# Altium PCB AP2-H.PcbDoc (part 4 of 4)
Units mm, origin at the board's own origin, x right, y up, seen from the top; angles counter-clockwise.
Board outline 380 x 190 mm, 2 copper layers (Top Layer, Bottom Layer); 519 components, 519 nets, 1666 pads, 438 vias.
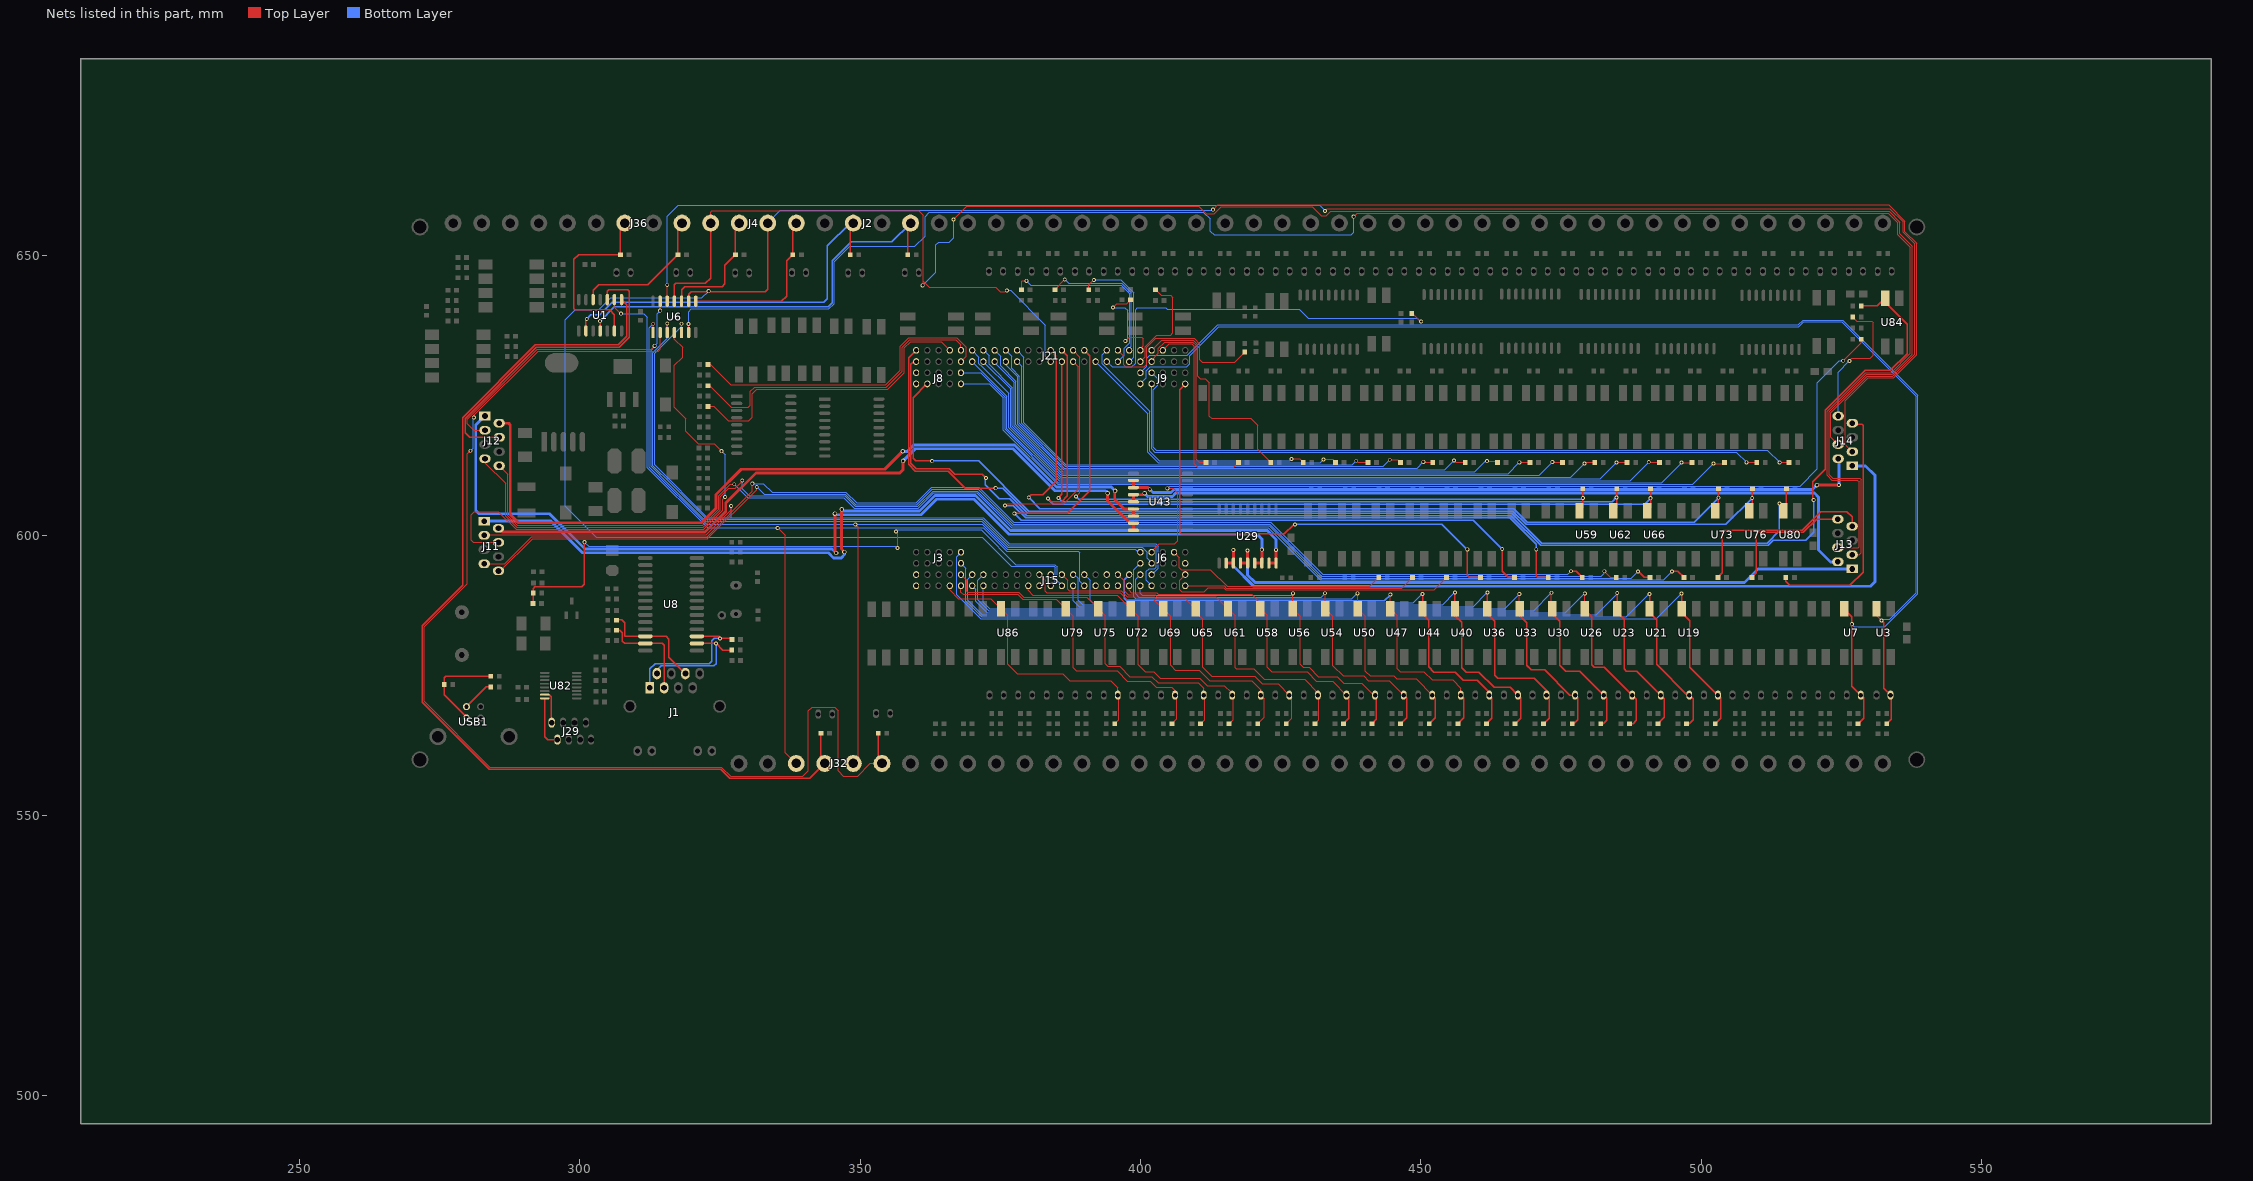
[diagram p4: the nets of this part, all layers, seen from the top]

## Via types
v1: diameter 0.7, hole 0.4, Top Layer to Bottom Layer, 204 vias
v2: diameter 1.2, hole 0.9, Top Layer to Bottom Layer, 160 vias
v3: diameter 1, hole 0.7, Top Layer to Bottom Layer, 38 vias
v4: diameter 0.8, hole 0.5, Top Layer to Bottom Layer, 14 vias
v5: diameter 3.556, hole 3.556, Top Layer to Bottom Layer, 10 vias
v6: diameter 2.3, hole 1.7, Top Layer to Bottom Layer, 8 vias
v7: diameter 1.1, hole 0.8, Top Layer to Bottom Layer, 2 vias
v8: diameter 2.8, hole 2.8, Top Layer to Bottom Layer, 2 vias

## Nets (pads, with @x,y where several pads share a name; then routed paths per layer and width w, separated by ;. In a path a pad name is that pad's centre, name@x,y a point inside that pad or via, vN(x,y) a via of type N, cw(c..) or ccw(c..) an arc to the next point about the centre after c; other vN are vias at no path point) (continued)
PD6: J15.8 LED51.K R225.2 U86.4 | length 49.8
  Top Layer w0.203: J15.8@366,591 366,590.261 367.542,588.719 373.316,588.719 U86.4@375.135,586.9 376.3,585.735 376.3,577 377.994,575.306 386.168,575.306 387.368,574.106 394.687,574.106 395.987,572.806 LED51.K@395.987,571.5 396.135,571.352 396.135,567.111 R225.2@395.424,566.4
PD7: J3.9 LED15.K R53.2 U19.4 | length 167.4
  Top Layer w0.16: U19.4@496.519,586.978 U19.4@496.597,586.9
  Top Layer w0.254: U19.4@496.519,586.978 v1(496.519,589.636) ; U19.4@496.597,586.9 496.597,586.203 498.031,584.769 498.031,576.488 LED15.K@503.019,571.5 503.489,571.03 503.489,567.365 R53.2@502.524,566.4
  Bottom Layer w0.16: J3.9@368,597 367.21,596.21 367.21,589.43 371.551,585.089 491.973,585.089 v1(496.519,589.636)
PD8: J21.19 R97.1 | length 78.3
  Top Layer w0.16: v1(438.506,613.308) 438.814,613 R97.1@440.595,613
  Bottom Layer w0.16: J21.19@378,633 379.21,631.79 379.21,620.102 386.689,612.623 437.82,612.623 v1(438.506,613.308)
PD9: J21.20 R108.1 | length 82.8
  Top Layer w0.16: v1(444.475,613.486) 445.887,613.486 R108.1@446.374,613
  Bottom Layer w0.16: J21.20@378,631 378.841,630.159 378.841,620.018 386.557,612.303 443.291,612.303 v1(444.475,613.486)
PD10: J21.17 R120.1 | length 91.6
  Top Layer w0.16: v1(450.469,613.105) 450.574,613 R120.1@452.153,613
  Bottom Layer w0.16: J21.17@376,633 377.088,631.912 377.088,629.768 378.435,628.421 378.435,619.972 386.424,611.983 449.346,611.983 v1(450.469,613.105)
PD11: J21.18 R64.1 | length 96.1
  Top Layer w0.16: v1(455.93,613.334) 456.264,613 R64.1@457.932,613
  Bottom Layer w0.16: J21.18@376,631 376,630.403 378.115,628.289 378.115,619.84 386.292,611.663 454.259,611.663 v1(455.93,613.334)
PD12: J21.15 R68.1 | length 105.1
  Top Layer w0.16: v1(461.823,613.232) 463.478,613.232 R68.1@463.711,613
  Bottom Layer w0.16: J21.15@374,633 375.056,631.944 375.056,630.25 377.795,627.512 377.795,619.707 386.159,611.343 459.654,611.343 461.543,613.232 v1(461.823,613.232)
PD13: J21.16 R79.1 | length 109.3
  Top Layer w0.16: v1(467.589,613.029) 467.618,613 R79.1@469.489,613
  Bottom Layer w0.16: J21.16@374,631 374,630.824 377.475,627.349 377.475,619.574 386.026,611.023 465.582,611.023 v1(467.589,613.029)
PD14: J21.13 R85.1 | length 118.5
  Top Layer w0.16: v1(473.481,613.08) 473.561,613 R85.1@475.268,613
  Bottom Layer w0.16: J21.13@372,633 372.027,633 372.999,632.028 372.999,630.504 377.155,626.349 377.155,619.442 385.894,610.703 471.104,610.703 v1(473.481,613.08)
PD15: J21.14 R37.1 | length 122.7
  Top Layer w0.16: v1(479.222,612.826) 479.396,613 R37.1@481.047,613
  Bottom Layer w0.16: J21.14@372,631 376.835,626.165 376.835,619.309 385.761,610.383 476.779,610.383 v1(479.222,612.826)
PE0: J15.22 LED44.K R190.2 U72.4 | length 55.8
  Top Layer w0.203: J15.22@380,591 380,590.181 380.84,589.341 395.83,589.341 U72.4@398.271,586.9 399.6,585.571 399.6,576.9 400.868,575.632 402.404,575.632 403.506,574.53 410.62,574.53 411.949,573.2 415,573.2 416.074,572.126 416.374,572.126 LED44.K@416.374,571.5 416.535,571.339 416.535,567.111 R190.2@415.824,566.4
PE1: J15.23 LED43.K R181.2 U69.4 | length 61.1
  Top Layer w0.203: J15.23@382,593 383,592 383,590.062 383.34,589.722 396.443,589.722 397.527,588.638 402.317,588.638 U69.4@404.055,586.9 405.4,585.555 405.4,576.8 406.262,575.938 410.487,575.938 412.362,574.063 419.9,574.063 421.471,572.492 LED43.K@421.471,571.5 422.1,570.871 422.1,567.576 R181.2@420.924,566.4
PE2: J15.27 LED42.K R168.2 U65.4 | length 61.5
  Top Layer w0.203: J15.27@386,593 387,592 387,590.417 387.332,590.086 396.593,590.086 397.66,589.019 402.481,589.019 402.8,588.7 408.039,588.7 U65.4@409.839,586.9 409.839,586.261 411.1,585 411.1,576.475 412.699,574.876 420.386,574.876 421.756,573.506 424.561,573.506 LED42.K@426.568,571.5 427,571.068 427,567.376 R168.2@426.024,566.4
PE3: J15.29 LED30.K R101.2 U40.4 | length 105.2
  Top Layer w0.254: v1(456.108,589.813) 456.11,589.812 U40.4@456.11,586.9 456.11,585.69 457.3,584.5 457.3,576.4 458.087,575.613 460.387,575.613 463.1,572.9 465.942,572.9 LED30.K@467.342,571.5 467.8,571.042 467.8,567.376 R101.2@466.824,566.4
  Bottom Layer w0.16: J15.29@388.241,593 388.884,592.357 388.884,588.447 389.715,587.616 453.911,587.616 v1(456.108,589.813)
  Bottom Layer w0.203: J15.29@388,593 J15.29@388.241,593
PE4: J15.30 LED29.K R94.2 U36.4 | length 110.8
  Top Layer w0.254: U36.4@461.894,586.9 461.894,586.006 463.2,584.7 463.2,575 463.721,574.479 470.221,574.479 472.439,572.261 LED29.K@472.439,571.5 ; U36.4@461.899,586.905 v1(461.899,589.813) ; R94.2@472.309,566.4 R94.2@471.924,566.4 472.9,567.376 472.9,571.039 LED29.K@472.439,571.5 ; LED29.K@472.439,571.734 LED29.K@472.439,571.5
  Bottom Layer w0.16: J15.30@388,591 388,588.351 389.054,587.296 459.382,587.296 v1(461.899,589.813)
PE5: J15.32 J32.1 U1.9 | length 167.9
  Top Layer w0.16: U1.9@306.183,642.045 306.183,640.703 v1(307.34,639.547) ; v1(335.305,601.32) 336.652,599.973 336.652,563.303 336.652,561.264 J32.1@338.607,559.308
  Bottom Layer w0.16: v1(307.34,639.547) 311.44,639.547 312.075,638.912 312.075,612.054 322.809,601.32 371.993,601.32 376.124,597.189 388.941,597.189 389.204,596.925 389.204,591.796 J15.32@390,591
PE6: J15.31 LED32.K R117.2 U44.4 | length 97.4
  Top Layer w0.254: v1@450.326,589.55 U44.4@450.326,586.9 450.326,585.974 451.406,584.894 451.406,576.541 452.334,575.613 456.177,575.613 457.632,574.157 460.088,574.157 462.245,572 462.7,571.045 462.7,567.376 R117.2@461.724,566.4
  Bottom Layer w0.16: J15.31@390,593 391.033,591.967 391.033,588.442 391.538,587.936 448.694,587.936 v1(450.317,589.559)
PE7: J21.42 R186.1 | length 18.9
  Top Layer w0.16: J21.42@400,631 400.853,631.853 400.853,633.644 402.92,635.711 405.384,635.711 405.816,636.143 405.816,642.391 405.409,642.798 403.702,642.798 R186.1@402.7,643.8
PE8: J21.41 R192.1 | length 18.1
  Top Layer w0.203: v1(395.097,640.639) 395.765,641.307 397.526,641.307 R192.1@398.246,642.027 ; v1(397.307,634.67) 397.993,635.356 400.202,635.356 400.535,635.023 400.535,633.83 400,633.295 J21.41@400,633
  Bottom Layer w0.203: v1(395.097,640.639) 397.189,640.639 397.722,640.105 397.722,635.085 v1(397.307,634.67)
PE9: J21.40 R198.1 | length 22.7
  Top Layer w0.16: R198.1@390.8,643.8 390.8,644.673 v1(391.693,645.566)
  Bottom Layer w0.16: v1@391.846,645.592 396.494,645.592 398.79,643.296 398.79,631.79 J21.40@398,631
PE10: J21.39 R210.1 | length 25.8
  Top Layer w0.16: R210.1@384.775,643.8 384.775,643.906 v1(386.512,645.643)
  Bottom Layer w0.16: v1(386.512,645.643) 387.198,644.957 396.672,644.957 396.674,644.959 398.384,643.249 398.384,633.706 398,633.323 J21.39@398,633
PE11: J21.38 R222.1 | length 34.7
  Top Layer w0.16: R222.1@378.8,643.8 378.8,645.297 378.943,645.439 v1@379.628,645.439
  Bottom Layer w0.16: v1(379.668,645.4) 380.449,644.619 396.562,644.619 398.064,643.117 398.064,634.335 397.104,633.374 397.104,632.104 J21.38@396,631
PE12: J21.37 R171.1 | length 32.7
  Top Layer w0.16: J21.37@396,633 397.027,631.973 397.027,630.428 397.383,630.072 400.71,630.072 401.173,630.535 401.173,633.511 402.782,635.12 409.589,635.12 410.616,634.092 410.616,631.276 410.994,630.899 416.799,630.899 R171.1@418.6,632.7
PE13: J21.36 R157.1 | length 69.7
  Top Layer w0.16: R157.1@448.4,639.6 448.485,639.6 v1@450.024,638.061
  Bottom Layer w0.16: J21.36@394,631 394.953,630.047 398.475,630.047 399.136,630.707 399.136,640.258 399.472,640.594 404.536,640.594 404.806,640.324 428.351,640.324 429.967,638.708 449.377,638.708 v1@450.024,638.061
  other v1: 450.088,638.124
PE14: J21.35 R145.1 | length 50.7
  Top Layer w0.16: v1(426.949,613.639) 428.398,613.639 R145.1@429.037,613
  Bottom Layer w0.16: J21.35@394,633 393.21,632.21 393.21,630.623 401.68,622.153 401.68,614.955 403.327,613.308 403.708,613.308 ; 403.352,613.308 403.708,613.308 ; v1(426.949,613.639) 426.618,613.308 403.708,613.308
PE15: J21.34 R91.1 | length 54.8
  Top Layer w0.203: v1(432.664,613.537) 434.279,613.537 R91.1@434.816,613
  Bottom Layer w0.203: J21.34@392,631 401.338,621.662 401.338,614.814 403.186,612.967 432.093,612.967 v1(432.664,613.537)
PF0: J15.37 LED41.K R161.2 U61.4 | length 56.7
  Top Layer w0.203: J15.37@396,593 397.1,591.9 397.1,590.143 397.843,589.4 402.639,589.4 402.958,589.081 413.442,589.081 U61.4@415.623,586.9 416.9,585.623 416.9,576.4 417.111,576.189 420.223,576.189 422.092,574.319 429.274,574.319 LED41.K@431.665,571.929 ; R161.2@431.124,566.4 431.835,567.111 431.835,571.329 LED41.K@431.665,571.5
  Top Layer w0.254: LED41.K@431.665,571.5 LED41.K@431.665,571.929
PF1: J15.40 LED40.K R149.2 U58.4 | length 59
  Top Layer w0.203: J15.40@398,591 398,590.181 398.4,589.781 402.881,589.781 403.2,589.462 419.838,589.462 421.406,587.894 U58.4@421.406,586.9 422.6,585.706 422.6,576.5 423.468,575.632 429.768,575.632 431.405,573.995 434.23,573.995 434.232,573.994 434.268,573.994 LED40.K@436.761,571.5
  Top Layer w0.254: R149.2@436.224,566.4 437.2,567.376 437.2,571.061 LED40.K@436.761,571.5
PF2: J15.39 LED31.K R123.2 U47.4 | length 86.3
  Top Layer w0.203: v1(444.576,589.432) 444.542,589.398 U47.4@444.542,586.9 445.8,585.642 445.8,576.2 446.311,575.689 450.536,575.689 452.027,574.198 455.702,574.198 457.148,572.752 LED31.K@457.148,571.5
  Top Layer w0.254: R123.2@456.624,566.4 457.7,567.476 457.7,570.948 LED31.K@457.148,571.5
  Bottom Layer w0.254: J15.39@398,593 397.1,592.1 397.1,588.801 397.598,588.303 443.523,588.303 v1@444.614,589.394
PF3: J15.42 LED39.K R143.2 U56.4 | length 63.2
  Top Layer w0.203: v1(427.228,589.661) 427.19,589.623 U56.4@427.19,586.9 428.5,585.59 428.5,576.985 429.04,576.445 430.105,576.445 431.742,574.808 435.103,574.808 436.311,573.6 439.501,573.6 441.601,571.5 LED39.K@441.858,571.5
  Top Layer w0.254: R143.2@441.324,566.4 442.086,567.162 442.086,571.272 LED39.K@441.858,571.5
  Bottom Layer w0.203: J15.42@400,591 400,589.643 400.311,589.332 426.899,589.332 v1(427.228,589.661)
PF4: J15.41 LED34.K R135.2 U54.4 | length 72.2
  Top Layer w0.203: v1(432.93,589.674) 432.974,589.63 U54.4@432.974,586.9 434.3,585.574 434.3,576.76 436.147,574.913 439.838,574.913 440.651,574.1 444.355,574.1 LED34.K@446.955,571.5
  Top Layer w0.254: R135.2@446.424,566.4 447.5,567.476 447.5,570.955 LED34.K@446.955,571.5
  Bottom Layer w0.16: J15.41@400,593 399.151,592.151 399.151,589.569 399.73,588.99 432.247,588.99 v1(432.93,589.674)
PF5: J6.2 LED33.K R129.2 U50.4 | length 80.9
  Top Layer w0.203: v1(438.734,589.661) 438.758,589.637 U50.4@438.758,586.9 440.1,585.558 440.1,575.8 440.987,574.913 445.192,574.913 445.728,574.376 449.176,574.376 LED33.K@452.052,571.5
  Top Layer w0.254: R129.2@451.524,566.4 452.6,567.476 452.6,570.952 LED33.K@452.052,571.5
  Bottom Layer w0.16: J6.2@400,595 398.831,593.831 398.831,589.047 399.207,588.67 437.693,588.67 438.506,589.483 438.734,589.483 v1(438.734,589.661)
PF6: J6.1 J32.3 U6.1 | length 165.2
  Top Layer w0.16: U6.1@313.067,636.177 v1@313.067,637.743 ; J32.3@349.098,559.598 349.656,559.039 349.656,601.421 v1(349.148,601.929)
  Bottom Layer w0.16: v1@313.086,637.763 312.395,637.071 312.395,612.186 322.626,601.955 371.811,601.955 376.257,597.509 399.111,597.509 399.62,597 J6.1@400,597
  other v1: 313.106,637.743
PF7: J15.44 U6.3 | length 133.7
  Top Layer w0.16: U6.3@315.607,636.177 v1(315.607,637.794)
  Bottom Layer w0.16: 315.607,609.879 316.212,609.274 ; v1(315.607,637.794) 315.607,635.185 313.035,632.612 313.035,612.451 316.212,609.274 ; J15.44@402.227,591 J15.44@402,591 401.041,591.959 401.041,593.573 401.549,594.081 402.6,594.081 402.854,594.335 402.854,597.955 402.649,598.16 376.51,598.16 371.811,602.859 327.137,602.859 327.132,602.854 322.632,602.854 316.212,609.274
PF8: J11.3 J15.43 U6.5 | length 178.8
  Top Layer w0.16: J11.3@282.956,599.999 283.047,600.09 322.548,600.09 327,604.542 v1(327,605.231) ; U6.5@318.147,636.177 v1@318.147,637.743
  Bottom Layer w0.16: v1(318.16,637.743) 318.16,637.286 313.355,632.48 313.355,612.584 322.759,603.179 327,603.179 ; v1(327,605.231) 327,603.179 ; J15.43@402,593 403.174,594.174 403.174,598.087 402.781,598.48 376.643,598.48 371.944,603.179 327,603.179
PF9: J6.4 J12.3 U6.13 | length 171.3
  Top Layer w0.16: J12.3@283.083,618.744 281.07,618.744 279.908,619.906 279.908,620.679 292.426,633.197 312.75,633.197 v1(313.36,633.806) ; v1(314.337,640.08) U6.13@314.337,641.765
  Bottom Layer w0.16: v1(314.337,640.08) 313.817,639.56 313.817,634.263 v1(313.36,633.806) 313.36,633.689 312.715,633.044 312.715,612.319 315.817,609.217 ; 315.287,609.746 315.817,609.217 ; J6.4@402,595 402,595.077 401.193,595.884 401.193,596.974 400.327,597.84 376.378,597.84 371.679,602.539 327.27,602.539 327.265,602.534 322.499,602.534 315.817,609.217
PF10: J6.3 R31.1 | length 160.3
  Top Layer w0.16: J6.3@402,597 402,597.148 403.357,598.505 406.126,598.505 406.654,599.034 406.654,607.543 405.816,608.38 405.155,608.38 ; v1(404.8,608.38) v1@404.978,608.203 ; v1(525.348,631.139) 528.574,634.365 R31.1@528.574,634.975
  Bottom Layer w0.16: v1(404.8,608.38) 405.203,608.783 517.657,608.783 520.751,611.877 520.751,627.228 524.662,631.139 v1(525.348,631.139)
PF11: J21.45 R132.1 | length 35.7
  Top Layer w0.16: J21.45@404,633 405.16,634.16 409.191,634.16 409.616,633.736 409.616,612.734 410.21,612.14 411.326,612.14
  Top Layer w0.203: 411.326,612.14 416.619,612.14 R132.1@417.479,613
PF12: J9.4 R11.1 | length 120.5
  Top Layer w0.16: v1(508.127,613.029) 509.913,613.029 R11.1@509.942,613
  Bottom Layer w0.16: J9.4@402,627 402,615.422 402.565,614.858 506.298,614.858 v1(508.127,613.029)
PF13: J9.3 R23.1 | length 128.6
  Top Layer w0.16: v1(514.023,613) R23.1@515.721,613
  Bottom Layer w0.16: J9.3@402,629 403.073,627.927 403.073,626.745 402.32,625.992 402.32,615.696 402.838,615.178 511.846,615.178 v1(514.023,613)
PF14: J21.44 R126.1 | length 32.6
  Top Layer w0.16: J21.44@402,631 402,631.251 403.21,632.461 403.21,633.377 404.313,634.48 409.324,634.48 409.936,633.868 409.936,613.588 410.523,613 R126.1@411.7,613
PF15: J21.43 R140.1 | length 40.4
  Top Layer w0.16: J21.43@402,633 403.8,634.8 409.456,634.8 410.256,634.001 410.256,628.35 410.667,627.939 411.607,627.939 412.318,627.228 412.318,621.233 412.699,620.852 419.684,620.852 420.929,619.608 420.929,615.329 R140.1@423.258,613
PG0: J9.2 LED1.K R10.2 U3.4 | length 215.2
  Top Layer w0.16: U3.4@531.3,586.9 531.3,585.716 v1(532.206,584.81)
  Top Layer w0.254: v1(532.206,584.81) 532.6,584.416 532.6,572.7 LED1.K@533.8,571.5 533.911,571.389 533.911,567.187 R10.2@533.124,566.4
  Bottom Layer w0.16: J9.2@400,627 401.066,628.066 401.066,629.371 401.792,630.098 408.265,630.098 408.79,630.623 408.79,632.056 413.948,637.214 517.465,637.214 518.334,638.084 525.114,638.084 525.693,637.504 ; 525.505,637.692 525.693,637.504 ; v1@532.441,585.024 533.67,585.024 538.363,589.717 538.363,624.834 525.693,637.504
PG1: J9.1 LED2.K R14.2 U7.4 | length 221.1
  Top Layer w0.254: U7.4@525.516,586.9 526.9,585.516 v1(526.9,584.149) 526.9,573.1 LED2.K@528.5,571.5 529,571 529,567.376 R14.2@528.024,566.4
  Bottom Layer w0.16: J9.1@400,629 401.149,630.149 401.149,631.577 401.676,632.104 408.386,632.104 413.816,637.534 517.332,637.534 518.202,638.404 525.247,638.404 538.683,624.967 538.683,589.585 532.79,583.692 527.357,583.692 v1(526.9,584.149)
PG2: J21.11 R42.1 | length 131.8
  Top Layer w0.16: v1(484.933,613) R42.1@486.826,613
  Bottom Layer w0.16: J21.11@370,633 371.21,631.79 371.21,630.623 371.673,630.16 371.692,630.16 376.515,625.338 376.515,619.177 385.629,610.063 481.996,610.063 v1(484.933,613)
PG3: J21.12 R50.1 | length 136.2
  Top Layer w0.16: v1(490.677,613.054) 492.551,613.054 R50.1@492.605,613
  Bottom Layer w0.16: J21.12@370,631 376.195,624.805 376.195,619.044 385.496,609.743 487.365,609.743 v1(490.677,613.054)
PG4: J21.9 R230.1 | length 57
  Top Layer w0.203: R230.1@322.859,626.694 323.215,626.694 327.05,622.859 330.04,622.859 330.421,623.24 330.421,625.663 331.173,626.415 354.691,626.415 357.533,629.257 357.533,633.575 358.875,634.916 367.057,634.916 368,633.974 J21.9@368,633
PG5: J21.10 R226.1 | length 57.3
  Top Layer w0.203: R226.1@322.885,630.479 323.266,630.479 326.923,626.821 354.584,626.821 357.17,629.407 357.17,633.725 358.724,635.279 367.208,635.279 368.935,633.552 368.935,631.935 J21.10@368,631
PG6: J8.9 R54.1 | length 143.3
  Top Layer w0.16: v1(496.519,612.978) 498.362,612.978 R54.1@498.384,613
  Bottom Layer w0.16: J8.9@368,629 371.531,629 375.875,624.657 375.875,618.912 385.364,609.423 492.964,609.423 v1(496.519,612.978)
PG7: J8.10 R7.1 | length 148.6
  Top Layer w0.16: v1(502.209,612.8) 503.964,612.8 R7.1@504.163,613
  Bottom Layer w0.16: J8.10@368,627 373.079,627 375.555,624.524 375.555,618.779 385.231,609.103 498.511,609.103 v1(502.209,612.8)
PG8: J21.7 R238.1 | length 55.8
  Top Layer w0.203: R238.1@322.859,622.996 323.941,622.996 326.517,620.42 330.175,620.42 330.784,621.03 330.784,625.264 331.572,626.052 354.926,626.052 357.896,629.021 357.896,633.424 359.025,634.553 364.447,634.553 J21.7@366,633
PG9: J3.10 LED16.K R57.2 U21.4 | length 159.2
  Top Layer w0.254: v1(490.804,589.559) 490.813,589.551 U21.4@490.813,586.9 490.813,586.187 492.1,584.9 492.1,576.972 497.572,571.5 LED16.K@497.923,571.5 498.579,570.843 498.579,567.1 497.879,566.4 R57.2@497.424,566.4
  Bottom Layer w0.16: J3.10@368,595 368.884,594.116 368.884,590.147 368.868,590.131 368.868,588.285 368.884,588.27 368.884,588.239 369.799,587.325
  Bottom Layer w0.203: 369.799,587.325 371.668,585.455 486.7,585.455 v1(490.804,589.559)
PG10: J15.9 LED49.K R196.2 U75.4 | length 64.5
  Top Layer w0.203: J15.9@368,593 369,592 369,590.062 369.2,589.862 378.286,589.862 379.187,588.96 390.427,588.96 U75.4@392.487,586.9 393.7,585.687 393.7,577.082 394.161,576.621 396.295,576.621 398.096,574.819 402.068,574.819 403.17,573.717 410.283,573.717 411.277,572.723 LED49.K@411.277,571.5 411.435,571.342 411.435,567.111 R196.2@410.724,566.4
PG11: J15.10 LED50.K R202.2 U79.4 | length 58.4
  Top Layer w0.203: J15.10@368,591 368,589.859 368.378,589.481 378.153,589.481 379.055,588.579 385.024,588.579 U79.4@386.703,586.9 388,585.603 388,576.4 388.592,575.808 395.867,575.808 397.668,574.006 401.731,574.006 402.833,572.904 405.596,572.904 406.181,572.319 LED50.K@406.181,571.5 406.5,571.181 406.5,567.276 R202.2@405.624,566.4
PG12: J15.11 LED17.K R67.2 U23.4 | length 151
  Top Layer w0.16: U23.4@485.029,586.9 U23.4@485.064,586.935
  Top Layer w0.254: U23.4@485.029,586.3 486.3,585.029 486.3,576.2 486.7,575.8 488.526,575.8 LED17.K@492.826,571.5 493.479,570.847 493.479,567.555 R67.2@492.324,566.4 ; U23.4@485.064,586.935 v1(485.064,589.712)
  Bottom Layer w0.16: 369.21,589.99 369.21,592.21 J15.11@370,593
  Bottom Layer w0.203: 369.21,589.99 369.21,588.427 371.819,585.818 481.272,585.818 v1@484.962,589.509
PG13: J15.12 LED18.K R72.2 U26.4 | length 142.8
  Top Layer w0.16: U26.4@479.245,586.9 479.273,586.927 v1(479.273,589.636)
  Top Layer w0.254: U26.4@479.247,586.74 480.5,585.487 480.5,576.9 480.954,576.446 482.783,576.446 LED18.K@487.729,571.5 488.479,570.75 488.479,567 487.879,566.4 R72.2@487.224,566.4
  Bottom Layer w0.203: J15.12@370,591 370.611,590.389 370.611,588.239 372.669,586.181 475.818,586.181 v1(479.273,589.636)
PG14: J15.13 LED19.K R82.2 U30.4 | length 138.5
  Top Layer w0.16: U30.4@473.329,587.032 v1(473.329,589.763)
  Top Layer w0.254: U30.4@473.461,586.054 474.8,584.715 474.8,576.846 ; 475.2,576.446 474.8,576.846 ; R82.2@482.124,566.4 482.579,566.4 483.2,567.021 483.2,570.932 LED19.K@482.632,571.5 478.332,575.8 475.846,575.8 474.8,576.846
  Bottom Layer w0.203: J15.13@372,593 371,592 371,588.509 372.955,586.555 470.121,586.555 v1(473.329,589.763)
PG15: J15.14 LED20.K R88.2 U33.4 | length 130.3
  Top Layer w0.16: U33.4@467.589,586.989 v1(467.589,589.534)
  Top Layer w0.254: U33.4@467.677,586.9 467.677,585.623 468.9,584.4 468.9,576.8 ; 469.13,576.57 468.9,576.8 ; R88.2@477.024,566.4 477.305,566.4 478.005,567.1 478.005,571.03 LED20.K@477.535,571.5 476.6,571.5 472.1,576 469.7,576 468.9,576.8
  Bottom Layer w0.203: J15.14@372,591 372,588.023 373.105,586.918 464.972,586.918 v1(467.589,589.534)
PH2: J6.7 R89.1 | length 40.7
  Top Layer w0.16: J6.7@406,597 406.959,596.041 406.959,594.208 407.264,593.903 412.496,593.903 415.473,590.926 440.929,590.926 R89.1@442.503,592.5
PH3: J15.50 R95.1 | length 41.5
  Top Layer w0.16: J15.50@408,591 408.008,590.992 414.954,590.992 415.34,590.606 446.661,590.606 R95.1@448.555,592.5
PH4: J15.49 R102.1 | length 52.2
  Top Layer w0.16: J15.49@408,593 407.01,592.01 407.01,590.321 407.391,589.94 411.383,589.94 412.095,590.652 414.842,590.652 415.208,590.286 452.393,590.286 R102.1@454.607,592.5
PH5: J9.10 R118.1 | length 87.9
  Top Layer w0.254: J9.10@408,627 406.984,625.984 406.984,607.731 407.021,607.695 407.021,600.572 407.314,600.278 425.679,600.278 427.33,601.929 v1(427.584,601.929) ; v1(458.318,597.51) 458.318,592.861 458.679,592.5 R118.1@460.659,592.5
  Bottom Layer w0.254: v1@427.622,601.967 427.634,601.98 453.746,601.98 v1@458.267,597.459
PH6: J21.31 R124.1 | length 136.9
  Top Layer w0.254: v1(377.52,603.91) 386.929,603.91 391.008,607.989 391.008,631.992 J21.31@390,633 ; v1(464.538,597.555) 464.538,593.594 465.633,592.5 R124.1@466.71,592.5
  Bottom Layer w0.254: v1@377.52,603.936 378.775,602.681 459.412,602.681 v1(464.538,597.555)
PH7: J21.30 R130.1 | length 142.6
  Top Layer w0.16: v1@376.072,605.409 376.276,605.612 386.319,605.612 388.884,608.178 388.884,630.116 J21.30@388,631
  Top Layer w0.254: v1(470.611,597.51) 470.611,592.799 470.91,592.5 R130.1@472.762,592.5
  Bottom Layer w0.254: v1(375.869,605.307) 377.36,605.307 379.572,603.095 465.915,603.095 470.611,598.399 v1(470.611,597.51)
PH8: J21.29 R150.2 U59.4 | length 121.7
  Top Layer w0.16: J21.29@388,633 389.204,631.796 389.204,607.593 v1(388.532,606.921)
  Top Layer w0.254: U59.4@478.327,604.4 478.903,604.976 R150.2@478.903,608.3
  Bottom Layer w0.254: v1(388.532,606.921) 389.046,606.407 478.645,606.407 v1(478.917,606.679)
PH9: J21.28 R162.2 U62.4 | length 128.8
  Top Layer w0.254: v1(385.394,606.679) 386,607.285 J21.28@386,631 ; U62.4@484.38,604.4 484.956,604.976 R162.2@484.956,608.3
  Bottom Layer w0.254: v1(385.394,606.679) 386.08,605.993 484.149,605.993 v1(484.911,606.755)
PH10: J21.27 R169.2 U66.4 | length 142.7
  Top Layer w0.254: v1(383.54,606.577) 384.099,606.019 385.978,606.019 386.994,607.035 386.994,632.006 J21.27@386,633 ; U66.4@490.433,604.4 491.009,604.976 R169.2@491.009,608.3
  Bottom Layer w0.254: v1@383.692,606.349 384.462,605.579 489.958,605.579 v1(491.007,606.628)
PH11: J4.1 J13.3 J21.26 U6.11 | length 367.7
  Top Layer w0.16: J4.1@323.342,655.93 323.342,657.657 323.571,657.885 360.477,657.885 361.236,657.127 361.236,645.366 ; v1(361.163,644.601) 361.236,644.674 361.236,645.366 ; v1@366.801,656.463 369.023,658.684 410.453,658.684 411.734,657.403 413.177,657.403 414.407,658.632 430.621,658.632 432.257,656.996 433.146,656.996 433.923,657.774 533.533,657.774 535.422,655.884 535.422,653.776 537.667,651.531 537.667,632.324 534.069,628.725 529.544,628.725 522.835,622.015 522.835,610.813 523.474,610.174 528.356,610.174 528.537,609.992 528.537,596.863 528.218,596.544 J13.3@526.948,596.544 ; v1@376.174,643.712 375.92,643.458 375.036,643.458 374.227,644.267 362.335,644.267 361.236,645.366
  Top Layer w0.254: U6.11@316.877,641.765 316.877,644.715 317.094,644.931 322.402,644.931 323.342,645.871 J4.1@323.342,655.701
  Bottom Layer w0.16: v1(361.163,644.601) 363.499,646.938 363.499,651.789 364.033,652.323 365.938,652.323 366.674,653.059 v1(366.674,656.336) ; v1(376.174,643.687) 376.861,643.687 383.032,637.515 383.032,631.968 J21.26@384,631
PH12: J21.25 R191.2 U73.4 | length 160.7
  Top Layer w0.254: v1(380.086,606.755) 380.568,607.238 382.575,607.238 385.013,609.676 385.013,631.987 J21.25@384,633 ; U73.4@502.54,604.4 503.116,604.976 R191.2@503.116,608.3
  Bottom Layer w0.254: v1(380.086,606.755) 382.09,604.751 466.601,604.751 468.983,602.369 498.787,602.369 v1(503.123,606.704)
PH13: J8.4 R197.2 U76.4 | length 175
  Top Layer w0.254: J8.4@362,627 361.9,627 359.476,624.576 359.476,613.766 359.959,613.283 362.814,613.283 v1(362.864,613.232) ; U76.4@508.593,604.4 509.169,604.976 R197.2@509.169,608.3
  Bottom Layer w0.254: v1@362.864,613.283 371.141,613.283 380.087,604.337 466.429,604.337 468.812,601.955 504.444,601.955 v1(509.143,606.654)
PH14: J21.1 R203.2 U80.4 | length 191.9
  Top Layer w0.254: J21.1@360,633 358.648,631.648 358.648,612.648 359.851,611.445 365.697,611.445 368.736,608.406 v1(374.193,608.406) ; U80.4@514.647,604.4 515.223,604.976 R203.2@515.223,608.3
  Bottom Layer w0.254: v1(374.193,608.406) 375.432,608.406 379.915,603.923 466.258,603.923 471.554,598.627 511.785,598.627 513.994,600.837 v1(513.994,605.663)
PH15: J21.2 R221.2 U84.4 | length 245.6
  Top Layer w0.254: J21.2@360,631 359.583,631 359.062,630.479 359.062,612.819 360.022,611.859 365.868,611.859 366.854,610.873 371.802,610.873 v1(372.466,610.21) ; v1@519.938,606.323 519.938,609.575 522.148,611.784 522.148,622.3 529.26,629.412 533.784,629.412 536.753,632.381 536.753,637.643 532.841,641.554 U84.4@532.841,642.284 531.475,640.918 R221.2@528.574,640.918
  Bottom Layer w0.254: v1(372.466,610.21) 372.313,610.057 372.313,609.041 374.802,606.552 376.701,606.552 379.744,603.509 466.086,603.509 471.382,598.213 511.956,598.213 512.886,599.144 518.685,599.144 520.065,600.524 v1@520.065,606.323
  other v1: 520.09,606.323
PI0: J8.1
PI1: J8.2
PI2: J15.1
PI3: J15.2
PI4: J15.24
PI5: J15.25
PI6: J4.3 J14.3 J15.26 U6.9 | length 439.7
  Top Layer w0.16: v1(412.953,658.089) 413.817,658.952 533.476,658.952 536.372,656.057 536.372,654.177 538.444,652.104 538.444,632.196 534.334,628.085 529.809,628.085 525.743,624.019 525.743,616.19 J14.3@526.999,614.934
  Top Layer w0.254: U6.9@319.417,641.765 319.417,643.013 319.877,643.473 333.085,643.473 333.542,643.93 J4.3@333.542,655.701
  Bottom Layer w0.16: v1(322.986,643.56) 321.776,642.349 305.505,642.349 303.363,640.207 299.187,640.207 297.412,638.433 297.412,605.227 302.983,599.657 371.773,599.657 376.959,594.472 384.601,594.472 384.81,594.263 384.81,591.81 J15.26@384,591 ; J4.3@333.542,655.701 335.803,657.962 v1@412.953,657.962
PI7: J15.28 R248.1 R249.1 | length 114.4
  Top Layer w0.16: v1@356.667,600.685 356.692,600.659 v1(356.692,597.738)
  Top Layer w0.254: R248.1@291.498,589.701 R248.1@291.702,589.701 ; R249.1@291.702,587.847 R248.1@291.702,589.701 ; v1(300.838,598.78) 300.838,591.297 300.337,590.796 291.991,590.796 291.702,590.507 R248.1@291.702,589.701
  Top Layer w0.508: R249.1@291.676,587.822 R249.1@291.702,587.847
  Bottom Layer w0.16: v1(300.838,598.78) 301.56,598.057 356.373,598.057 v1(356.692,597.738) ; v1(356.387,600.685) 356.667,600.964 371.636,600.964 377.808,594.792 384.734,594.792 385.13,594.396 385.13,591.87 J15.28@386,591
PI8: J15.34
PI9: J15.36
PI10: J15.35
PI11: J15.38
PWM1: J2.2 R254.2 U1.2 | length 68.1
  Top Layer w0.254: U1.2@301.103,636.457 301.103,638.288 v1@301.244,638.429 ; R254.2@348.249,650.062 348.249,655.361 J2.2@348.691,655.803
  Bottom Layer w0.254: v1@301.244,638.429 v1(301.244,638.581) 301.973,639.31 303.571,639.31 305.829,641.568 343.55,641.568 344.178,642.196 344.178,651.619 348.209,655.65 J2.2@348.691,655.65
PWM2: J2.4 R253.2 U1.4 | length 74.6
  Top Layer w0.254: U1.4@303.643,636.457 v1@303.643,638.2 ; R253.2@358.496,650.062 358.496,655.196 J2.4@359,655.7
  Bottom Layer w0.254: v1(303.632,638.2) 306.172,640.74 344.288,640.74 345.006,641.458 345.006,648.942 348.412,652.348 355.648,652.348 J2.4@359,655.7
PWM3: J36.3 R255.2 U1.6 | length 34
  Top Layer w0.254: U1.6@306.183,636.457 306.183,639.357 305.316,640.225 299.169,640.225 298.966,640.428 298.966,649.224 299.804,650.062 R255.2@307.264,650.062 307.264,654.928 J36.3@308.037,655.701
PWM4: J36.1 R256.2 U1.12 | length 25.4
  Top Layer w0.254: U1.12@302.373,642.045 302.373,643.699 303.378,644.703 312.151,644.703 R256.2@317.51,650.062 317.51,654.975 J36.1@318.237,655.701
PWM5: J4.2 R257.2 U6.10 | length 22.1
  Top Layer w0.254: U6.10@318.147,641.765 318.147,643.8 318.694,644.347 ; 318.719,644.373 325.399,644.373 325.882,644.855 325.882,648.188 R257.2@327.757,650.062 327.757,655.016 J4.2@328.442,655.701
PWM8: J4.4 R258.2 U6.8 | length 30.3
  Top Layer w0.254: U6.8@320.687,641.765 335.975,641.765 336.88,642.671 336.88,648.94 R258.2@338.003,650.062 338.003,655.062 J4.4@338.642,655.701
PWM9: J32.2 R259.2 U1.8 | length 180.2
  Top Layer w0.254: U1.8@307.453,642.045 308.399,641.099 308.399,635.502 306.875,633.978 292.102,633.978 279.127,621.002 279.127,591.064 271.921,583.858 271.921,570.216 283.845,558.292 325.12,558.292 326.746,556.666 341.066,556.666 J32.2@343.707,559.308 343.002,560.014 R259.2@343.002,564.693
PWM10: J32.4 R260.2 U6.2 | length 212.6
  Top Layer w0.16: v1@280.58,614.909 280.289,614.909 279.97,614.59 279.97,591.389 272.288,583.706 272.288,570.368 283.983,558.673 325.258,558.673 326.898,557.033 339.801,557.033 340.792,558.024 340.792,568.706 341.427,569.341 345.465,569.341 346.075,568.731 346.075,558.038 347.04,557.073 349.58,557.073 351.815,559.308 J32.4@353.907,559.308 ; v1(281.102,621.005) 281.102,621.42 292.558,632.877 314.03,632.877 314.337,633.183 U6.2@314.337,636.177
  Top Layer w0.254: R260.2@353.238,564.693 353.238,559.978 J32.4@353.907,559.308
  Bottom Layer w0.16: v1@280.289,614.883 280.963,615.558 280.963,620.866 v1(281.102,621.005)
  other v1: 280.498,615.092
PWM11: J11.4 U6.4 | length 96.1
  Top Layer w0.16: J11.4@285.496,598.729 281.026,598.729 280.67,599.084 280.67,603.682 281.203,604.215 285.492,604.215 288.629,601.078 322.139,601.078 325.501,604.44 325.501,606.4 v1(325.933,606.831) ; U6.4@316.877,636.177 316.877,634.988 318.338,633.527 318.338,631.785 316.877,630.324 316.877,622.847 318.936,620.787 318.936,618.567 321.172,616.331 323.977,616.331 v1(325.29,615.018) v1@325.501,614.807
  Bottom Layer w0.16: v1(325.29,615.018) 325.907,614.401 v1@325.907,606.831
PWM12: J12.4 U1.10 | length 58.1
  Top Layer w0.254: J12.4@285.623,617.474 280.365,617.474 279.541,618.298 279.541,620.831 292.274,633.564 307.047,633.564 308.813,635.33 308.813,643.56 308.534,643.839 305.206,643.839 304.913,643.546 U1.10@304.913,642.045
PWM13: J13.4 U6.6 | length 316.4
  Top Layer w0.16: U6.6@319.417,636.177 v1@319.417,637.718 ; v1@438.074,656.844 438.683,657.454 533.4,657.454 535.102,655.752 535.102,653.644 537.347,651.398 537.347,632.456 533.936,629.045 529.412,629.045 522.515,622.148 522.515,610.681 523.342,609.854 527.888,609.854 528.217,609.525 528.217,597.966 528.066,597.814 J13.4@524.408,597.814
  Bottom Layer w0.16: v1@319.417,637.718 319.417,639.863 319.927,640.373 344.44,640.373 345.373,641.306 345.373,648.79 348.169,651.586 359.791,651.586 361.594,653.39 361.594,656.854 362.382,657.642 411.241,657.642 412.445,656.438 412.445,654.279 413.131,653.593 437.617,653.593 438.074,654.05 v1@438.074,656.844
  other v1: 319.405,637.718 438.048,656.844
PWM14: J14.4 U6.12 | length 287.9
  Top Layer w0.16: U6.12@315.607,641.765 v1(315.607,644.677) ; v1(432.943,657.86) 433.357,658.274 533.702,658.274 536.052,655.924 536.052,654.044 538.124,651.972 538.124,632.328 534.201,628.405 529.677,628.405 523.155,621.883 523.155,617.508 J14.4@524.459,616.204
  Bottom Layer w0.16: v1(315.607,644.677) 315.607,656.907 317.537,658.837 431.966,658.837 v1(432.943,657.86)
PX1: J11.7 R148.2 | length 212.3
  Top Layer w0.16: J11.7@282.956,594.919 286.578,594.919 291.429,599.77 322.714,599.77 330.784,607.84 v1(330.784,609.219)
  Top Layer w0.254: v1(476.809,593.598) 477.716,593.598 R148.2@478.814,592.5
  Bottom Layer w0.16: v1(330.784,609.219) 332.765,609.219 334.295,607.69 347.489,607.69 349.383,605.795 359.999,605.795 362.751,608.547 371.181,608.547 377.414,602.314 423.228,602.314 432.514,593.028 476.238,593.028 v1(476.809,593.598)
PX2: J11.8 R160.2 | length 215.7
  Top Layer w0.16: J11.8@285.496,593.649 285.852,593.649 291.628,599.426 322.789,599.426 322.813,599.45 322.847,599.45 331.572,608.175 v1(331.572,608.609) ; v1(482.752,593.598) 483.85,592.5 R160.2@484.866,592.5
  Bottom Layer w0.16: v1@331.61,608.647 332.887,607.37 347.356,607.37 349.251,605.475 360.132,605.475 362.884,608.227 371.048,608.227 377.281,601.994 423.095,601.994 432.382,592.708 482.244,592.708 482.752,593.216 v1(482.752,593.598)
PX3: J12.7 R166.2 | length 232.8
  Top Layer w0.16: J12.7@283.083,613.664 283.083,612.978 286.79,609.271 286.79,603.37 288.719,601.441 322.049,601.441 325.096,604.488 325.096,606.926 326.601,608.432 327.711,608.432 v1@328.879,609.6
  Top Layer w0.254: v1(488.772,593.573) 489.845,592.5 R166.2@490.917,592.5
  Bottom Layer w0.16: v1(328.981,609.803) 328.981,608.279 330.21,607.05 347.224,607.05 349.118,605.155 360.264,605.155 363.016,607.907 370.916,607.907 377.148,601.674 422.962,601.674 432.249,592.388 487.587,592.388 v1(488.772,593.573)
PX4: J12.8 R178.2 | length 234.8
  Top Layer w0.16: J12.8@285.623,612.394 287.11,610.907 287.11,603.503 288.852,601.761 321.917,601.761 324.776,604.62 324.776,607.059 326.835,609.117 v1(327.558,609.117)
  Top Layer w0.254: v1@495.021,593.598 495.871,593.598 R178.2@496.969,592.5
  Bottom Layer w0.16: v1@327.571,609.13 329.971,606.73 347.091,606.73 348.986,604.835 360.397,604.835 363.149,607.587 370.783,607.587 377.016,601.354 422.83,601.354 432.116,592.068 493.338,592.068 v1(494.843,593.573)
PX5: J13.7 R189.2 | length 35.1
  Top Layer w0.254: R189.2@503.021,592.5 503.809,593.288 503.809,600.608 504.139,600.939 518.058,600.939 521.334,604.215 526.034,604.215 526.948,603.301 J13.7@526.948,601.624
PX6: J13.8 R195.2 | length 23.7
  Top Layer w0.254: R195.2@509.073,592.5 509.88,593.307 509.88,600.177 510.228,600.525 518.229,600.525 520.599,602.894 J13.8@524.408,602.894
PX7: J14.7 R201.2 | length 44
  Top Layer w0.254: R201.2@515.124,592.5 515.124,591.782 515.849,591.058 526.542,591.058 528.904,593.42 528.904,619.608 528.701,619.811 527.202,619.811 J14.7@526.999,620.014
PX8: J14.8 R217.2 | length 25.2
  Top Layer w0.203: v1(526.466,631.114) 526.923,631.571 530.149,631.571 530.708,632.13 530.708,637.972 530.454,638.226 527.761,638.226 R217.2@527.05,638.937
  Bottom Layer w0.203: J14.8@524.459,621.284 524.459,629.107 v1(526.466,631.114)
PY1: J11.1 U29.17 U29.18 | length 162.5
  Top Layer w0.508: v4@346.685,604.622 346.685,597.56 346.926,597.319 ; U29.17@422.93,595.05 U29.18@424.2,595.05 v1(424.2,597.413)
  Bottom Layer w0.508: J11.1@282.956,602.539 294.818,602.539 300.461,596.895 344.353,596.895 345.262,595.986 346.634,595.986 347.218,596.57 v4(347.218,597.027) ; v4(346.735,604.622) 347.016,604.341 360.601,604.341 363.353,607.093 370.578,607.093 376.811,600.86 422.625,600.86 424.2,599.285 v1(424.2,597.413)
PY2: J12.1 U29.15 U29.16 | length 177.9
  Top Layer w0.508: v4(345.516,603.885) 345.516,597.052 v4(345.719,596.849) ; U29.15@420.39,595.05 U29.16@421.66,595.05 v1(421.66,597.439)
  Bottom Layer w0.508: J12.1@283.083,621.284 281.457,619.658 281.457,604.444 282.042,603.86 294.619,603.86 300.916,597.563 345.005,597.563 v4(345.719,596.849) ; v4(345.516,603.885) 345.728,603.673 360.878,603.673 363.63,606.425 370.302,606.425 376.535,600.192 420.829,600.192 421.66,599.362 v1(421.66,597.439)
PY3: J13.1 U29.13 U29.14 | length 117.3
  Top Layer w0.508: U29.13@417.85,595.05 U29.14@419.12,595.05 v1(419.12,597.301)
  Bottom Layer w0.508: v1(419.12,597.301) 419.12,592.948 420.494,591.574 507.754,591.574 510.184,594.004 J13.1@526.948,594.004
PY4: J14.1 U29.11 U29.12 | length 146.5
  Top Layer w0.508: U29.11@415.31,595.05 U29.12@416.58,595.05 v1(416.58,597.377)
  Bottom Layer w0.508: v1(416.58,597.377) 416.58,594.543 420.218,590.906 530.225,590.906 531.063,591.744 531.063,610.692 529.361,612.394 J14.1@526.999,612.394
PY5: J11.2 U43.17 U43.18 | length 128.8
  Top Layer w0.508: J11.2@285.496,601.269 286.181,600.584 322.344,600.584 326.034,604.275 326.034,605.739 331.412,611.116 357.07,611.116 357.657,611.704 v4(357.657,613.283) ; v4(394.157,607.492) 394.157,606.146 398.133,602.17 U43.17@398.75,602.17 U43.18@398.75,600.9
  Bottom Layer w0.508: v4@357.886,613.486 359.842,615.442 377.248,615.442 384.75,607.941 393.683,607.941 394.006,607.821 v4(394.157,607.492)
PY6: J12.2 U43.15 U43.16 | length 143.7
  Top Layer w0.508: J12.2@285.623,620.014 285.648,619.989 287.325,619.989 287.604,619.709 287.604,603.707 289.056,602.255 321.712,602.255 324.282,604.825 324.282,607.263 328.803,611.784 354.406,611.784 v4(357.607,614.985) ; v4@395.427,607.695 395.427,606.4 397.117,604.71 U43.15@398.75,604.71 U43.16@398.75,603.44
  Bottom Layer w0.508: v4@357.607,614.955 358.41,614.955 359.565,616.11 377.525,616.11 385.027,608.609 394.793,608.609 v4(395.478,607.924)
PY7: J13.2 U43.13 U43.14 | length 138.1
  Top Layer w0.508: U43.14@398.75,605.98 U43.13@398.75,607.25 400.469,607.25 v4(400.736,607.517)
  Bottom Layer w0.508: v4(400.736,607.517) 401.305,606.948 405.709,606.948 406.296,607.535 520.225,607.535 520.954,606.806 520.954,597.408 523.088,595.274 J13.2@524.408,595.274
PY8: J14.2 U43.11 U43.12 | length 132.8
  Top Layer w0.508: U43.11@398.75,609.79 U43.12@398.75,608.52 401.359,608.52 v1(401.676,608.203) ; v4(520.675,608.965) v1(524.586,608.965)
  Bottom Layer w0.508: v1(401.676,608.203) 402.262,607.616 405.432,607.616 406.019,608.203 519.913,608.203 v4(520.675,608.965) ; J14.2@524.459,613.664 524.586,613.537 v1(524.586,608.965)
RS232_RX: J29.1 U82.7 | length 5.9
  Top Layer w0.254: U82.7@293.75,571.575 294.525,571.575 294.925,571.175 294.925,566.675 J29.1@295,566.6
RS232_TX: J29.2 U82.8 | length 9.3
  Top Layer w0.254: U82.8@293.75,570.925 293.75,564.05 294.248,563.552 J29.2@296.016,563.552
TPIN+: J1.3 R3.2 U8.13 | length 18
  Top Layer w0.254: R3.2@306.548,583.075 307.093,583.075 307.568,582.6 307.568,581.132 307.985,580.715 U8.13@311.7,580.715 314.685,580.715 315.04,580.36 J1.3@315.04,572.8
TPIN-: J1.6 R4.1 U8.12 | length 19.5
  Top Layer w0.254: R4.1@306.524,584.9 307.5,584.9 308,584.4 308,582.132 308.147,581.985 U8.12@311.7,581.985 315.415,581.985 315.9,581.5 315.9,578.29 J1.6@318.85,575.34
TPOUT+: J1.1 R1.2 U8.17 | length 26.8
  Top Layer w0.254: U8.17@320.9,581.985 324.764,581.985 325.089,581.66 326.963,581.66 R1.2@327.176,581.447
  Bottom Layer w0.254: J1.1@312.5,572.8 312.5,576.2 313.432,577.132 323.132,577.132 323.5,577.5 323.5,581.158 323.952,581.609 324.968,581.609 v1(324.993,581.584)
TPOUT-: J1.2 R2.1 U8.16 | length 21.9
  Top Layer w0.254: U8.16@320.9,580.715 v1(324.315,580.715) 325.483,579.547 R2.1@327.1,579.547
  Bottom Layer w0.254: J1.2@313.77,575.34 313.77,575.97 314.5,576.7 323.9,576.7 324.315,577.115 v1(324.315,580.715)
USB_D+: R250.1 R252.2 USB1.3 | length 17.3
  Top Layer w0.254: USB1.3@279.781,567.411 279.781,567.614 275.819,571.576 R250.1@275.819,573.38 275.819,574.624 276.073,574.878 R252.2@284.124,574.878
USB_D-: R251.2 USB1.2 | length 5.8
  Top Layer w0.254: USB1.2@279.781,569.443 283.312,572.973 R251.2@284.124,572.973
VBAT: J6.10
pads on no net: J1.7 J1.8 J7.5 J11.6 U82.11 U82.12 U82.13 U82.14 U99.5
copper on no net:
  other v2: 335.077,590.855
  other v5: 311.23,566.196 322.66,566.196 276.602,592.379 533.302,592.734 276.602,603.809 533.302,604.164 276.729,611.124 533.353,611.124 276.729,622.554 533.353,622.554
  other v6: 273.556,590.239 536.348,590.604 273.556,605.939 536.348,606.304 273.683,608.984 536.399,608.994 273.683,624.684 536.399,624.694
  other v8: 290.936,561.52 305.668,561.52

## Polygon pours and split planes (outlines as drawn)
GND on Top Layer "Bottom Layer-No Net" (hatched 90Degree grid 0.508 track 0.203, remove dead copper, pour order 2): 252.07,674.726 248.945,671.601 248.945,545.567 565.074,545.567 568.554,542.087 549.402,561.238 549.402,671.957 249.631,671.957 242.316,664.642
GND on Bottom Layer "Bottom Layer-No Net" (hatched 90Degree grid 0.508 track 0.203, remove dead copper, pour order 4): 253.467,676.834 252.07,675.437 252.07,539.648 566.471,539.648 567.157,538.963 563.321,542.798 563.321,666.369 255.219,666.369 250.673,670.916

## Keep-outs
Keep-Out Layer:
  lines w0.254: 270,555 270,660 540,660 540,555 270,555

## Silkscreen, mask and mechanical layers (free items; w line width, h text height)
Top Overlay:
  text "GND" at 296.951,650.697 h0.8
  text "485A" at 291.465,650.494 h0.8
  text "485B" at 284.277,650.418 h0.8
  text "阿波罗二号工业控制器高级版" at 329.463,601.599 h2.5
  text "东莞月无声电子 YWS®" at 331.826,598.805 h2.5
  text "AP2-H" at 339.039,596.722 h2.5
  text "AD1" at 368.427,570.89 h0.8
  text "AD0" at 363.017,570.814 h0.8
  text "GND" at 332.41,563.702 h0.8
  text "24V" at 326.06,563.575 h0.8

## Text inside footprints (layer, text, board x,y; h text height)
C32: Top Overlay "+" at 313.849,611.08 h0.8 r180
C33: Top Overlay "+" at 312.63,630.206 h0.8 r180
C34: Top Overlay "+" at 294.825,610.978 h0.8 r180
LED65: Top Overlay "+" at 358.487,645.463 h0.8
LED66: Top Overlay "+" at 346.006,646.203 h0.8
LED67: Top Overlay "+" at 306.857,645.362 h0.8
LED68: Top Overlay "+" at 315.323,646.279 h0.8
LED69: Top Overlay "+" at 325.839,646.203 h0.8
LED70: Top Overlay "+" at 335.973,646.254 h0.8
USB1: Top Overlay "4" at 283.591,567.411 h1.27 r270; Top Overlay "1" at 283.591,569.951 h1.27 r270